# Altium PCB Akustikk_forsterkerkrets.PcbDoc
Units mm, origin at the board's own origin, x right, y up, seen from the top; angles counter-clockwise.
Board outline 133.3 x 70 mm, 3 copper layers (Top Layer, Ground Plane, Bottom Layer), stack 0.488 mm thick; 79 components, 45 nets, 323 pads, 37 vias.
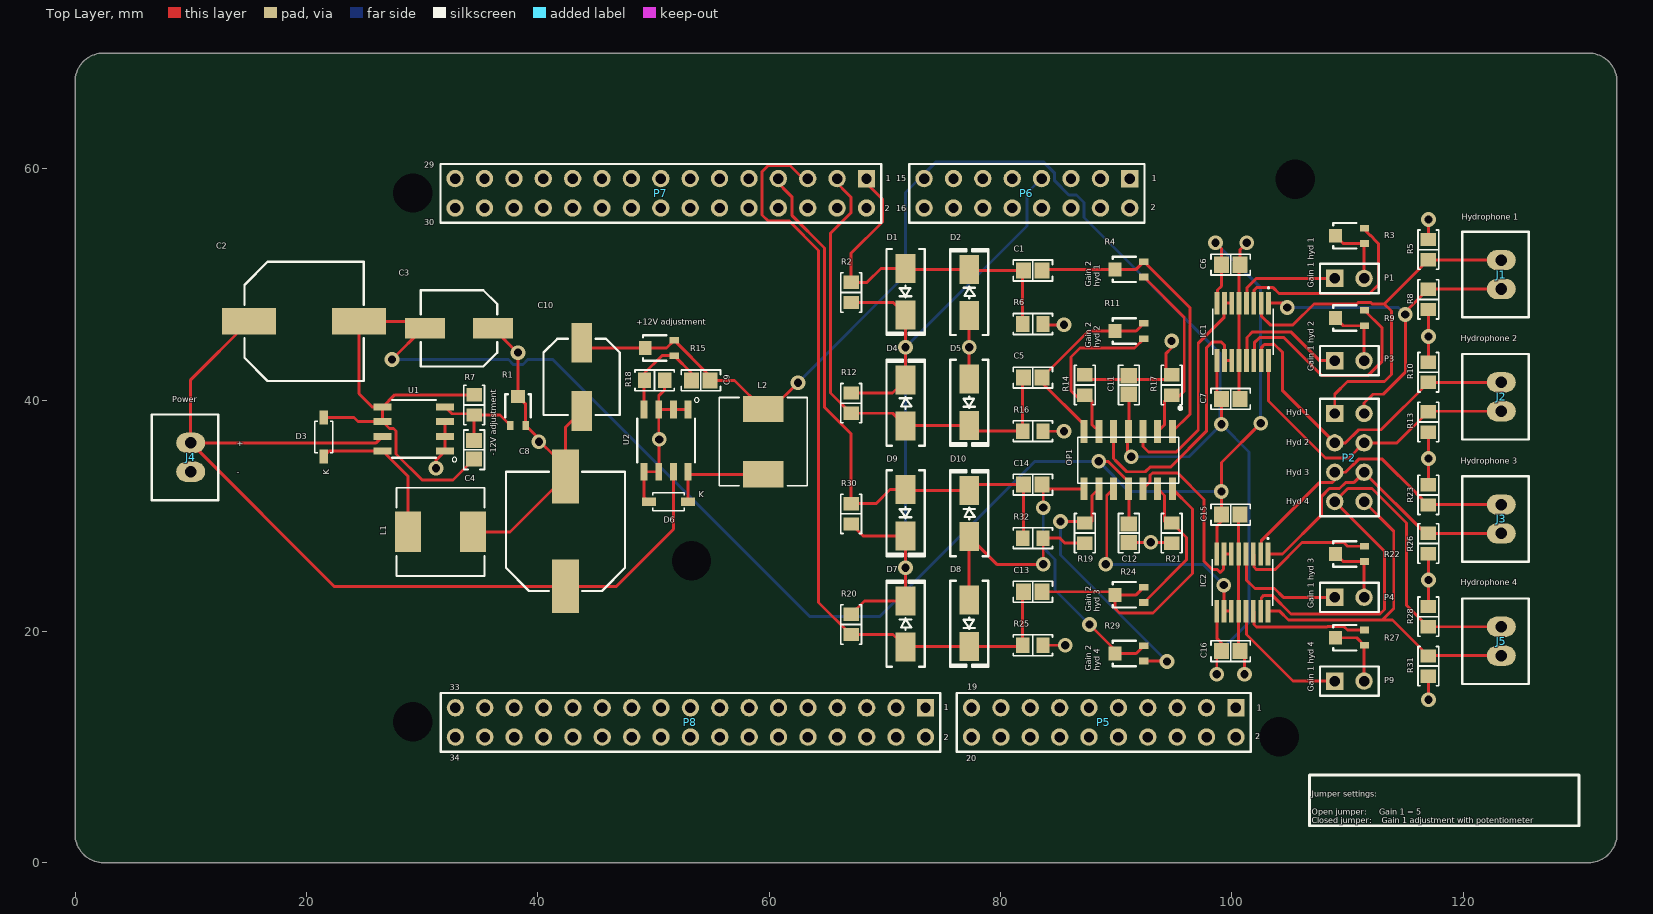
[diagram p0: Top Layer view]
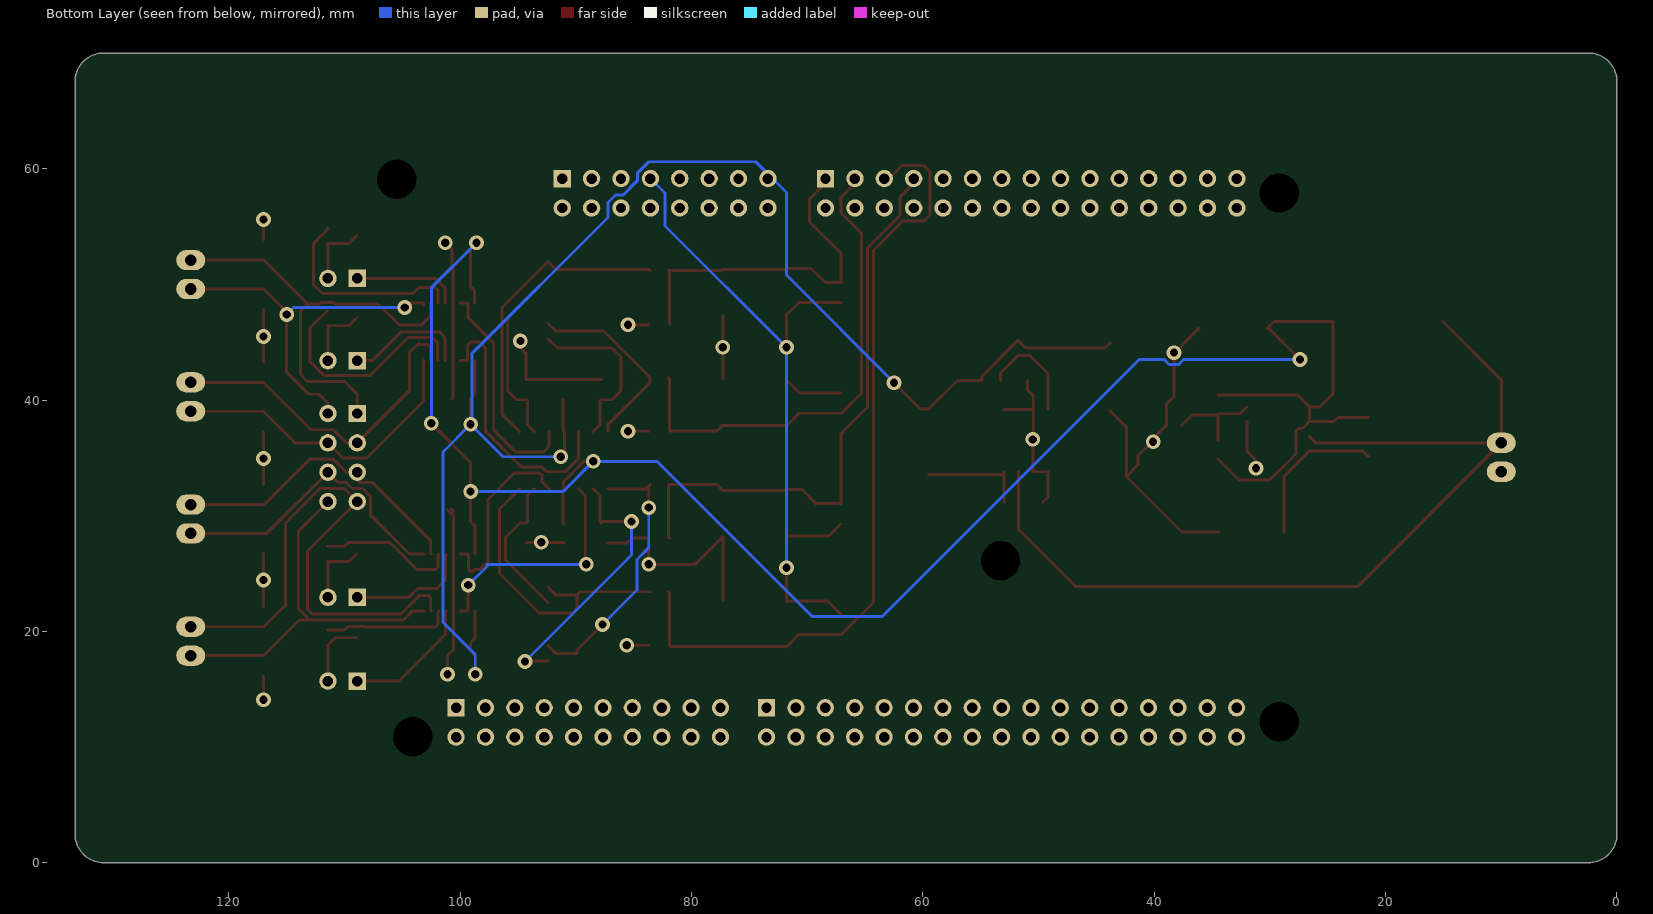
[diagram p1: Bottom Layer view, seen from below]
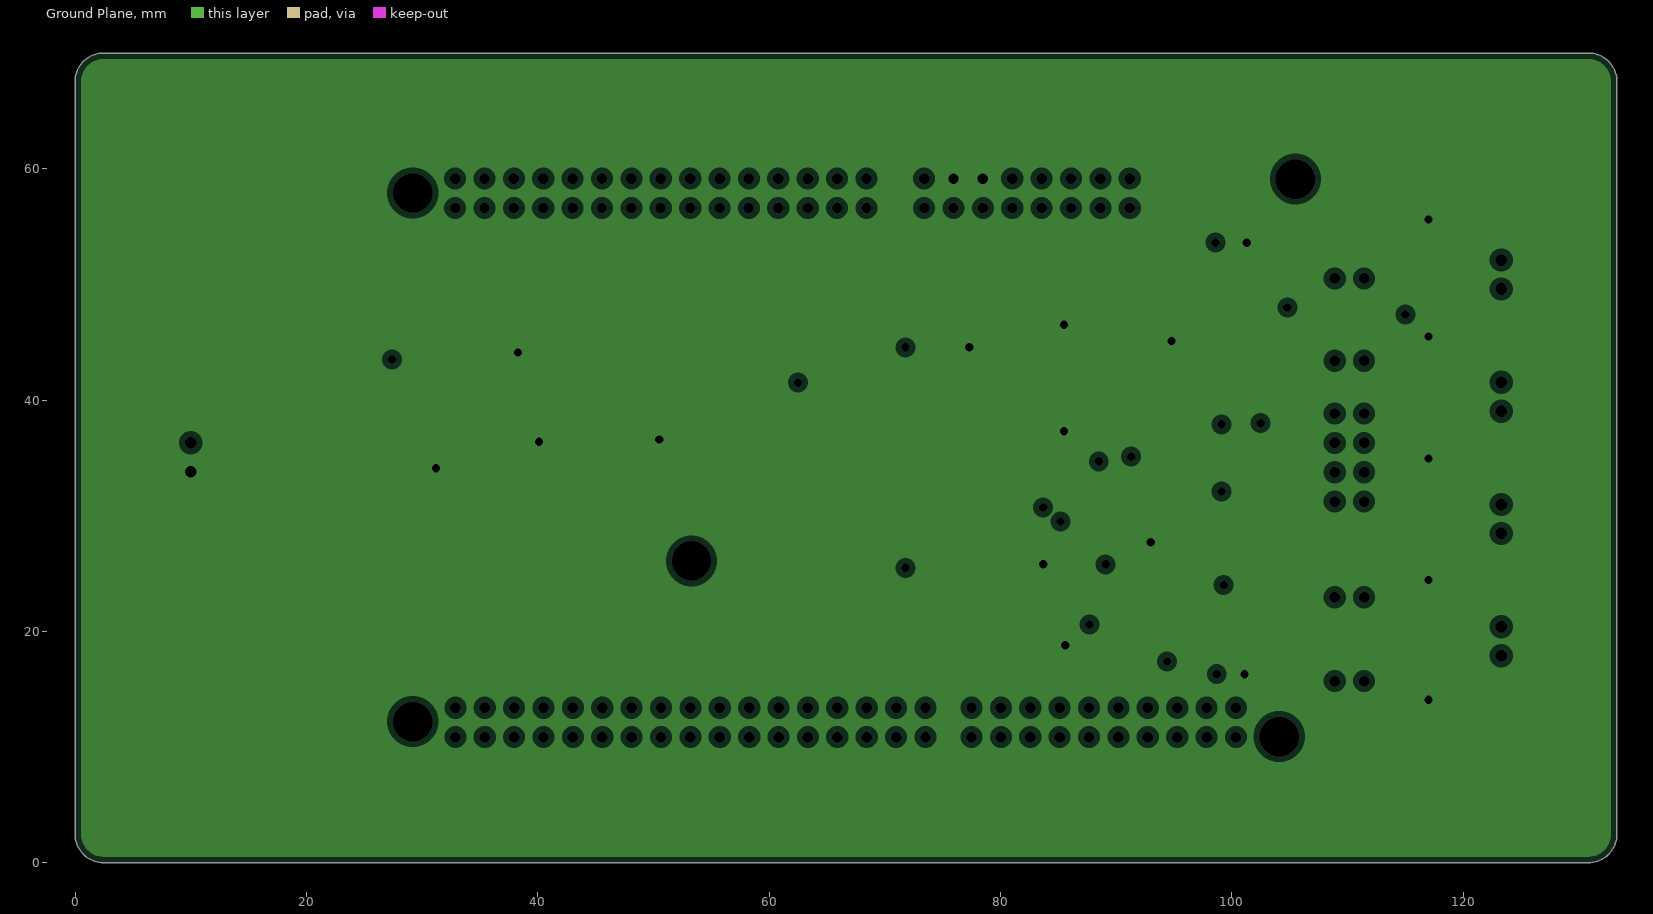
[diagram p2: Ground Plane, clearances drawn from the general rule]
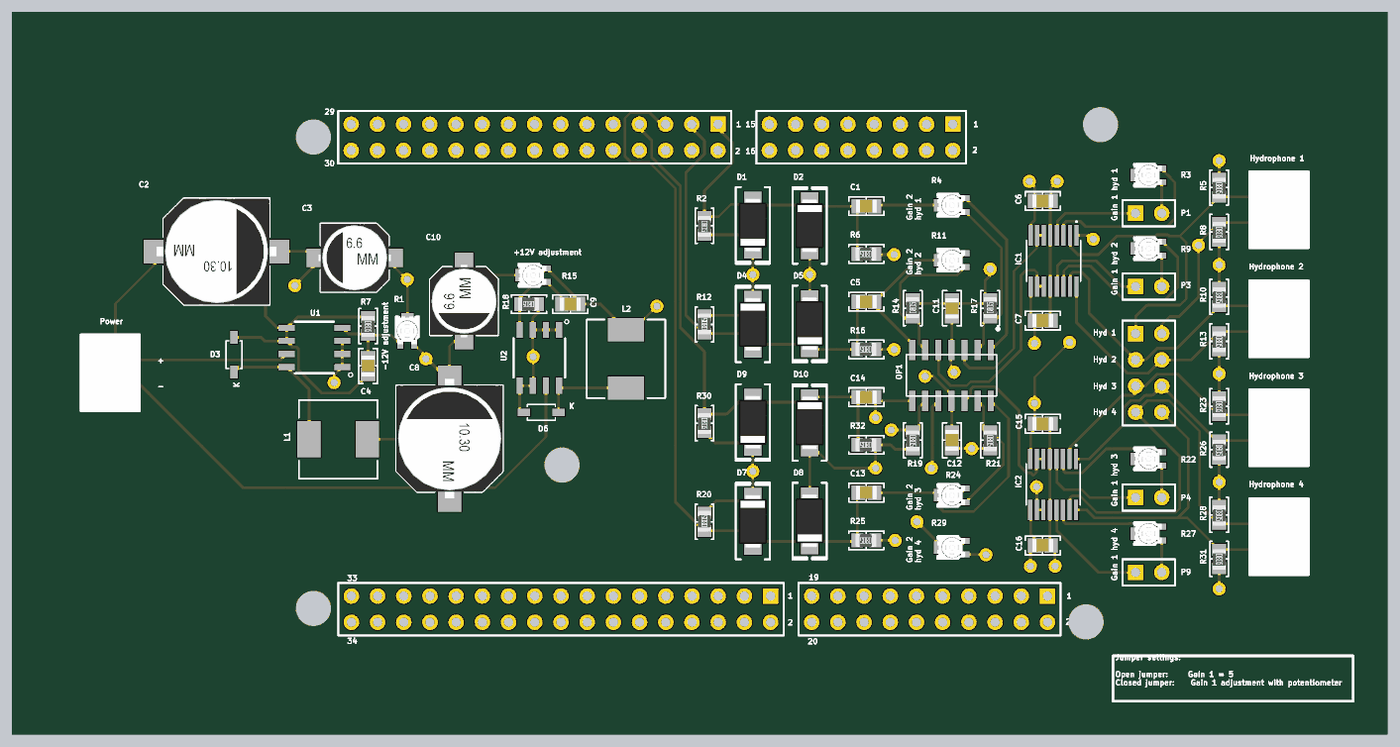
[diagram p3: 3D render of the assembled board from above, using the file's embedded part models]

## Layer stack, top to bottom
Top Solder: solder mask 0.0102, Solder Resist, Dk 3.5
Top Layer: signal copper 0.0356
Dielectric 1: core 0.254, FR-4, Dk 4.2
Ground Plane: plane copper 0.036, net GND
Dielectric 2: prepreg 0.127, Dk 4.2
Bottom Layer: signal copper 0.0356
Bottom Solder: solder mask 0.0102, Solder Resist, Dk 3.5

## Board outline
133.3,2.489 cw(c130.811,2.489) 130.811,0 2.489,0 cw(c2.489,2.489) 0,2.489 0,67.511 cw(c2.489,67.511) 2.489,70 130.811,70 cw(c130.811,67.511) 133.3,67.511

## Design rules (kind name [scope] priority, off if disabled: settings)
Clearance [All] p1: gap=0.254 ignorepadtopadclearanceinfootprint=FALSE except(0: Arc-Hole Track-Hole SMDPad-Hole THPad-Hole Via-Hole Fill-Hole Poly-Hole Region-Hole Text-Hole; 0.1: SMDPad-SMDPad)
PlaneClearance [All] p1: clearance=0.508
PlaneConnect [All] p1: planeconnectstyle=Relief reliefexpansion=0.508 reliefentries=4 reliefconductorwidth=0.254 reliefairgap=0.254
PolygonConnect [All] p1: connectstyle=Relief reliefconductorwidth=0.254 reliefentries=4 polygonreliefangle="90 Angle" airgapwidth=0.254
RoutingVias [All] p1: holewidth=0.711 width=1.27 viastyle="Through Hole" minholewidth=0.711 minwidth=1.27 maxholewidth=0.711 maxwidth=1.27
SolderMaskExpansion [All] p1: expansion=0.102
Width [All] p1: maxlimit=0.254 minlimit=0.254 preferedwidth=0.254
28 further rules are at their usual default settings.

## Components (designator, comment, footprint, x,y, rotation, side; value= is the part's Value field where it differs from the comment)
C1 "1uF" "CAP 0805/2012" 82.8,51.2 r180 top
C2 "100uF" "CAP ALUM 10.3MM" 19.8,46.8 r0 top
C3 "220uF" "CAP ALUM 6.6MM" 33.2,46.2 r180 top
C4 "1500pF" "CAP 0805/2012" 34.5,35.7 r90 top
C5 "1uF" "CAP 0805/2012" 82.8,41.943 r180 top
C6 "0.1uF" "CAP 0805/2012" 99.9,51.7 r0 top
C7 "0.1uF" "CAP 0805/2012" 99.9,40.1 r180 top
C8 "100uF" "CAP ALUM 10.3MM" 42.4,28.65 r90 top
C9 "1500pF" "CAP 0805/2012" 54.1,41.7 r0 top
C10 "220uF" "CAP ALUM 6.6MM" 43.8,42 r270 top
C11 "0.1uF" "CAP 0805/2012" 91.1,41.3 r270 top
C12 "0.1uF" "CAP 0805/2012" 91.1,28.5 r270 top
C13 "1uF" "CAP 0805/2012" 82.8,23.429 r180 top
C14 "1uF" "CAP 0805/2012" 82.8,32.686 r180 top
C15 "0.1uF" "CAP 0805/2012" 99.9,30.1 r0 top
C16 "0.1uF" "CAP 0805/2012" 99.9,18.3 r180 top
D1 "B130-13-F" "DO214AC SMA" 71.8,49.367 r270 top
D2 "B130-13-F" "DO214AC SMA" 77.3,49.3 r90 top
D3 "1N5819HW-7-F" 1N5819HW-7-F 21.5,36.8 r90 top
D4 "B130-13-F" "DO214AC SMA" 71.8,39.744 r90 top
D5 "B130-13-F" "DO214AC SMA" 77.3,39.811 r270 top
D6 "1N5819HW-7-F" 1N5819HW-7-F 51.3,31.2 r180 top
D7 "B130-13-F" "DO214AC SMA" 71.8,20.633 r90 top
D8 "B130-13-F" "DO214AC SMA" 77.3,20.7 r270 top
D9 "B130-13-F" "DO214AC SMA" 71.8,30.256 r270 top
D10 "B130-13-F" "DO214AC SMA" 77.3,30.189 r90 top
IC1 "INA2126" SOP63P600X175-16N 100.95,45.9 r270 top
IC2 "INA2126" SOP63P600X175-16N 100.913,24.225 r270 top
J1 "Hydrophone 1" "JST XH B2B-XH-A" 123.3,50.85 r270 top
J2 "Hydrophone 2" "JST XH B2B-XH-A" 123.3,40.283 r270 top
J3 "Hydrophone 3" "JST XH B2B-XH-A" 123.3,29.717 r270 top
J4 "Power" "JST XH B2B-XH-A" 10,35.05 r270 top
J5 "Hydrophone 4" "JST XH B2B-XH-A" 123.3,19.15 r270 top
L1 "DR74-101-R" DR74-101-R 31.6,28.6 r180 top value="100 µH"
L2 "DR74-101-R" DR74-101-R 59.5,36.4 r270 top value="100 µH"
OP1 "4x Operational Amplifier 25MHz" SOIC127P600X175-14N 91.053,34.8 r270 top
P1 "Valg av forstekning" HDR1X2 108.9,50.513 r0 top
P2 "Testpins" HDR2X4 108.9,38.84 r270 top
P3 "Valg av forstekning" HDR1X2 108.9,43.4 r0 top
P4 "Valg av forstekning" HDR1X2 108.9,22.947 r0 top
P5 "CN7 header 10X2" HDR2X10 100.36,13.4 r180 top
P6 "CN8 header 8X2" HDR2X8 91.18,59.14 r180 top
P7 "CN9 header 15X2" HDR2X15 68.42,59.14 r180 top
P8 "CN10 header 17X2" HDR2X17 73.52,13.4 r180 top
P9 "Valg av forstekning" HDR1X2 108.9,15.7 r0 top
R1 "50k" "POT BOURNS TRIMPOT 3302" 38.3,39.1 r0 top
R2 "100k" "RES 0805/2012" 67.1,49.3 r270 top
R3 "20k" "POT BOURNS TRIMPOT 3302" 110.17,54.2 r90 top
R4 "100k" "POT BOURNS TRIMPOT 3302" 91.1,51.3 r90 top
R5 "47k" "RES 0805/2012" 117,53 r270 top
R6 "100k" "RES 0805/2012" 82.8,46.571 r180 top
R7 "1.21k" "RES 0805/2012" 34.5,39.575 r270 top
R8 "47k" "RES 0805/2012" 117,48.7 r270 top
R9 "20k" "POT BOURNS TRIMPOT 3302" 110.17,47.087 r90 top
R10 "47k" "RES 0805/2012" 117,42.4 r270 top
R11 "100k" "POT BOURNS TRIMPOT 3302" 91.1,45.962 r90 top
R12 "100k" "RES 0805/2012" 67.1,39.733 r90 top
R13 "47k" "RES 0805/2012" 117,38.1 r270 top
R14 "5.1k" "RES 0805/2012" 87.3,41.3 r90 top
R15 "50k" "POT BOURNS TRIMPOT 3302" 50.5,44.5 r90 top
R16 "100k" "RES 0805/2012" 82.8,37.314 r180 top
R17 "5.1k" "RES 0805/2012" 94.8,41.3 r90 top
R18 "1.21k" "RES 0805/2012" 50.1,41.7 r180 top
R19 "5.1k" "RES 0805/2012" 87.3,28.5 r270 top
R20 "100k" "RES 0805/2012" 67.1,20.6 r90 top
R21 "5.1k" "RES 0805/2012" 94.8,28.5 r270 top
R22 "20k" "POT BOURNS TRIMPOT 3302" 110.17,26.7 r90 top
R23 "47k" "RES 0805/2012" 117,31.8 r270 top
R24 "100k" "POT BOURNS TRIMPOT 3302" 91.1,23.162 r90 top
R25 "100k" "RES 0805/2012" 82.8,18.8 r180 top
R26 "47k" "RES 0805/2012" 117,27.6 r270 top
R27 "20k" "POT BOURNS TRIMPOT 3302" 110.17,19.453 r90 top
R28 "47k" "RES 0805/2012" 117,21.275 r270 top
R29 "100k" "POT BOURNS TRIMPOT 3302" 91.1,18.1 r90 top
R30 "100k" "RES 0805/2012" 67.1,30.167 r270 top
R31 "47k" "RES 0805/2012" 117,17 r270 top
R32 "100k" "RES 0805/2012" 82.8,28.057 r180 top
U1 "SOIC127P600X175-8N" SOIC127P600X175-8N 29.3,37.5 r180 top
U2 "SOIC127P600X175-8N" SOIC127P600X175-8N 51.1,36.5 r270 top

## Footprints (in the part's own frame and the unit in brackets; to place one, negate y for a bottom-side part, rotate by r counter-clockwise, add the part's x,y. Pads: shape width x height; smd on the part's side, far side on the other; paste and mask are expansions set on the pad)
1N5819HW-7-F [mm]
  rect 1.21x0.73 smd: 1(-1.68,0) 2(1.68,0)
  silkscreen extent -1.35,-0.77 1.35,0.78
"CAP 0805/2012" [mm] "Chip Capacitor, 2-Leads, Body 2.00x1.20mm, IPC Medium Density"
  rect 1.3x1.4 smd: 1(-0.8,0) 2(0.8,0)
  silkscreen extent -1.7,-0.9 1.7,0.9, body extent -1,-0.64 1,0.64, height 1.26
"CAP ALUM 6.6MM" [mm] "Aluminum Electrolytic Capacitor, Body 6.60x6.60x7.70mm, IPC Low Density"
  rect 3.45x1.8 smd: 1(-2.95,0) 2(2.95,0)
  silkscreen extent -3.3,-3.3 3.3,3.3, body extent -3.5,-3.3 3.5,3.3, height 7.7
"CAP ALUM 10.3MM" [mm] "Aluminum Electrolytic Capacitor, Body 10.30x10.30x10.50mm, IPC Low Density"
  rect 4.65x2.3 smd: 1(-4.75,0) 2(4.75,0)
  silkscreen extent -5.15,-5.15 5.15,5.15, body extent -5.8,-5.15 5.8,5.15, height 10.5
"DO214AC SMA" [mm] "Molded Diode, 2-Leads, Body 4.30x2.60mm, IPC Medium Density"
  rect 2.5x1.7 smd: 1(-2,0) 2(2,0)
  silkscreen extent -3.68,-1.65 3.75,1.65, body extent -2.6,-1.37 2.6,1.37, height 2.4
DR74-101-R [mil]
  rect 89x138 smd: 1(-111,0) 2(111,0)
  silkscreen extent -150,-150 150,150
HDR1X2 [mm] "Connector; Header; 2 Position"
  rect 1.5x1.5 hole 0.9: 1(0,0)
  round 1.5 hole 0.9: 2(2.54,0)
  silkscreen extent -1.27,-1.27 3.81,1.27
HDR2X4 [mm] "Connector; Header; 4x2 Position"
  rect 1.5x1.5 hole 0.9: 1(0,0)
  round 1.5 hole 0.9: 2(0,2.54) 3(2.54,0) 4(2.54,2.54) 5(5.08,0) 6(5.08,2.54) 7(7.62,0) 8(7.62,2.54)
  silkscreen extent -1.27,-1.27 8.89,3.81
HDR2X8 [mm] "Connector; Header; 8x2 Position"
  rect 1.5x1.5 hole 0.9: 1(0,0)
  round 1.5 hole 0.9: 2(0,2.54) 3(2.54,0) 4(2.54,2.54) 5(5.08,0) 6(5.08,2.54) 7(7.62,0) 8(7.62,2.54) 9(10.16,0) 10(10.16,2.54) 11(12.7,0) 12(12.7,2.54) 13(15.24,0) 14(15.24,2.54) 15(17.78,0) 16(17.78,2.54)
  silkscreen extent -1.27,-1.27 19.05,3.81
HDR2X10 [mm] "Connector; Header; 10x2 Position"
  rect 1.5x1.5 hole 0.9: 1(0,0)
  round 1.5 hole 0.9: 2(0,2.54) 3(2.54,0) 4(2.54,2.54) 5(5.08,0) 6(5.08,2.54) 7(7.62,0) 8(7.62,2.54) 9(10.16,0) 10(10.16,2.54) 11(12.7,0) 12(12.7,2.54) 13(15.24,0) 14(15.24,2.54) 15(17.78,0) 16(17.78,2.54) 17(20.32,0) 18(20.32,2.54) 19(22.86,0) 20(22.86,2.54)
  silkscreen extent -1.27,-1.27 24.13,3.81
HDR2X15 [mm] "Connector; Header; 15x2 Position"
  rect 1.5x1.5 hole 0.9: 1(0,0)
  round 1.5 hole 0.9: 2(0,2.54) 3(2.54,0) 4(2.54,2.54) 5(5.08,0) 6(5.08,2.54) 7(7.62,0) 8(7.62,2.54) 9(10.16,0) 10(10.16,2.54) 11(12.7,0) 12(12.7,2.54) 13(15.24,0) 14(15.24,2.54) 15(17.78,0) 16(17.78,2.54) 17(20.32,0) 18(20.32,2.54) 19(22.86,0) 20(22.86,2.54) 21(25.4,0) 22(25.4,2.54) 23(27.94,0) 24(27.94,2.54) 25(30.48,0) 26(30.48,2.54) 27(33.02,0) 28(33.02,2.54) 29(35.56,0) 30(35.56,2.54)
  silkscreen extent -1.27,-1.27 36.83,3.81
HDR2X17 [mm] "Connector; Header; 17x2 Position"
  rect 1.5x1.5 hole 0.9: 1(0,0)
  round 1.5 hole 0.9: 2(0,2.54) 3(2.54,0) 4(2.54,2.54) 5(5.08,0) 6(5.08,2.54) 7(7.62,0) 8(7.62,2.54) 9(10.16,0) 10(10.16,2.54) 11(12.7,0) 12(12.7,2.54) 13(15.24,0) 14(15.24,2.54) 15(17.78,0) 16(17.78,2.54) 17(20.32,0) 18(20.32,2.54) 19(22.86,0) 20(22.86,2.54) 21(25.4,0) 22(25.4,2.54) 23(27.94,0) 24(27.94,2.54) 25(30.48,0) 26(30.48,2.54) 27(33.02,0) 28(33.02,2.54) 29(35.56,0) 30(35.56,2.54) 31(38.1,0) 32(38.1,2.54) 33(40.64,0) 34(40.64,2.54)
  silkscreen extent -1.27,-1.27 41.91,3.81
"JST XH B2B-XH-A" [mm]
  oval 1.75x2.5 hole 1: 1(-1.25,0) 2(1.25,0)
  silkscreen extent -3.7,-3.38 3.7,2.38, body extent -3.7,-3.38 3.7,2.38, height 7
"POT BOURNS TRIMPOT 3302" [mm] "Bourns Trimpot 3302 - Open Frame 2.75mm x 2.20mm x 1.05mm"
  rect 0.575x0.8 smd: 1(-0.662,-1.3) 3(0.662,-1.3)
  rect 1.2x1.1 smd: 2(0,1.2)
  silkscreen extent -1.1,-0.6 1.1,1.4, body extent -1.1,-1.3 1.1,1.45, height 0.81
"RES 0805/2012" [mm] "Chip Resistor, 2-Leads, Body 2.00x1.25mm, IPC Medium Density"
  rect 1.15x1.35 smd: 1(-0.875,0) 2(0.875,0)
  silkscreen extent -1.7,-0.9 1.7,0.9, body extent -0.95,-0.62 1.05,0.63, height 0.6
SOIC127P600X175-8N [mm]
  rect 1.55x0.6 smd: 1(-2.7,1.905) 2(-2.7,0.635) 3(-2.7,-0.635) 4(-2.7,-1.905) 5(2.7,-1.905) 6(2.7,-0.635) 7(2.7,0.635) 8(2.7,1.905)
  silkscreen extent -3.7,-2.5 1.9,2.85
SOIC127P600X175-14N [mm]
  rect 1.97x0.6 smd: 1(-2.475,3.81) 2(-2.475,2.54) 3(-2.475,1.27) 4(-2.475,0) 5(-2.475,-1.27) 6(-2.475,-2.54) 7(-2.475,-3.81) 8(2.475,-3.81) 9(2.475,-2.54) 10(2.475,-1.27) 11(2.475,0) 12(2.475,1.27) 13(2.475,2.54) 14(2.475,3.81)
  silkscreen extent -4.6,-4.38 2,4.6
SOP63P600X175-16N [mm]
  rect 1.97x0.41 smd: 1(-2.475,2.223) 2(-2.475,1.588) 3(-2.475,0.953) 4(-2.475,0.318) 5(-2.475,-0.317) 6(-2.475,-0.952) 7(-2.475,-1.587) 8(-2.475,-2.222) 9(2.475,-2.222) 10(2.475,-1.587) 11(2.475,-0.952) 12(2.475,-0.317) 13(2.475,0.318) 14(2.475,0.953) 15(2.475,1.588) 16(2.475,2.223)
  silkscreen extent -3.87,-2.62 1.99,2.62

## Part data
C1 C5 C13 C14: library part C0805C105J3RACTU, "CAP CER 1UF 25V X7R 0805", Device Package="0805 (2012 Metric)", Manufacturer=Kemet, Supplier Part Number 1=399-10060-2-ND, TemperatureCoefficient=X7R, TemperatureRange="-55C ~ 125C", Tolerance=5%, Voltage=25V, ComponentLink1Description=Datasheet, ComponentLink1URL=http://www.kemet.com/docfinder?Partnumber=C0805C105J3RACTU, ComponentLink2Description="Digi-Key listing", ComponentLink2URL=http://digikey.com/product-detail/en/C0805C105J3RACTU/399-10060-2-ND/2211758, PartId=6145, Part Number=C0805C105J3RACTU, Price=0,355, Supplier 1=Digi-Key, Type=-
C2 C8: library part EEE-FC1H101P, "CAP ALUM 100UF 20% 50V SMD", Device Package="Radial, Can - SMD", Lifetime @ Temp="1000 Hrs @ 105C", Manufacturer="Panasonic Electronic Components", Ripple Current=375mA, Supplier Part Number 1=PCE4013TR-ND, TemperatureRange="-40C ~ 105C", Tolerance=20%, Voltage=50V, ComponentLink1Description=Datasheet, ComponentLink1URL=http://industrial.panasonic.com/www-cgi/jvcr13pz.cgi?E+PZ+3+ABA0005+EEEFC1H101P+7+WW, ComponentLink2Description="Digi-Key listing", ComponentLink2URL=http://digikey.com/product-detail/en/EEE-FC1H101P/PCE4013TR-ND/817422, Impedance="300 mOhm", PartId=7438, Part Number=EEE-FC1H101P, Price=0,4156, Supplier 1=Digi-Key, Type=AEC-Q200
C3 C10: library part EEE-FTE221XAP, "CAP ALUM 220UF 20% 25V SMD", Device Package="Radial, Can - SMD", Lifetime @ Temp="2000 Hrs @ 105C", Manufacturer="Panasonic Electronic Components", Ripple Current=390mA, Supplier Part Number 1=PCE5009TR-ND, TemperatureRange="-55C ~ 105C", Tolerance=20%, Voltage=25V, ComponentLink1Description=Datasheet, ComponentLink1URL=http://industrial.panasonic.com/lecs/www-data/pdf/ABA0000/ABA0000CE135.pdf, ComponentLink2Description="Digi-Key listing", ComponentLink2URL=http://digikey.com/product-detail/en/EEE-FTE221XAP/PCE5009TR-ND/2652040, Impedance=-, PartId=7275, Part Number=EEE-FTE221XAP, Price=0,3668, Supplier 1=Digi-Key, Type=Automotive
C4 C9: library part C2012C0G1H152J060AA, "CAP CER 1500PF 50V C0G 0805", Device Package="0805 (2012 Metric)", Manufacturer="TDK Corporation", Supplier Part Number 1=445-1331-2-ND, TemperatureCoefficient="C0G, NP0", TemperatureRange="-55C ~ 125C", Tolerance=5%, Voltage=50V, ComponentLink1Description=Datasheet, ComponentLink1URL=https://product.tdk.com/info/en/catalog/datasheets/mlcc_commercial_general_en.pdf, ComponentLink2Description="Digi-Key listing", ComponentLink2URL=http://digikey.com/product-detail/en/C2012C0G1H152J060AA/445-1331-2-ND/513857, PartId=4413, Part Number=C2012C0G1H152J060AA, Price=0,0308, Supplier 1=Digi-Key, Type=-
C6 C7 C11 C12 C15 C16: library part CL21B104KACNNNC, "CAP CER 0.1UF 25V X7R 0805", Device Package="0805 (2012 Metric)", Manufacturer="Samsung Electro-Mechanics America, Inc.", Supplier Part Number 1=1276-1099-2-ND, TemperatureCoefficient=X7R, TemperatureRange="-55C ~ 125C", Tolerance=10%, Voltage=25V, ComponentLink1Description=Datasheet, ComponentLink1URL=http://www.samsungsem.com/kr/support/product-search/mlcc/CL21B104KACNNNC.jsp, ComponentLink2Description="Digi-Key listing", ComponentLink2URL=http://digikey.com/product-detail/en/CL21B104KACNNNC/1276-1099-2-ND/3886757, PartId=5699, Part Number=CL21B104KACNNNC, Price=0,0099, Supplier 1=Digi-Key, Type=-
D1 D2 D4 D5 D7 D8 D9 D10: "DIODE SCHOTTKY 30V 1A SMA", Current Rectified=1A, Current Reverse Leakage @ Vr="500uA @ 30V", Device Package="DO-214AC, SMA", Junction Operating Temperature="-65C ~ 150C", Manufacturer="Diodes Incorporated", Supplier Part Number 1=B130-FDITR-ND, Voltage DC Reverse (Vr)=30V, Voltage Forward (Vf)="500mV @ 1A", ComponentLink1Description=Datasheet, ComponentLink1URL=http://www.diodes.com/_files/datasheets/ds13002.pdf, ComponentLink2Description="Digi-Key Listing", ComponentLink2URL=http://www.digikey.ca/product-detail/en/B130-13-F/B130-FDITR-ND/814935, PartId=7122, Part Number=B130-13-F, Price=0,0852, Reverse Recovery Time (trr)=-, Supplier 1=Digi-Key, Type="Surface Mount"
D3 D6: "1N5819HW Series 40 V 1 A Surface Mount Schottky Barrier Rectifier - SOD-123", Package="SOD-123 Diodes Inc.", Supplier Part Number 1=1N5819HW-FDICT-ND, ComponentLink1Description="Manufacturer Link", ComponentLink1URL=https://www.digikey.no/en/supplier-centers/d/diodes, ComponentLink2Description=Datasheet, ComponentLink2URL=https://www.diodes.com/assets/Datasheets/ds30217.pdf, Digi-Key_Part_Number=1N5819HW-FDICT-ND, Digi-Key_Purchase_URL=https://www.digikey.no/product-detail/en/diodes-incorporated/1N5819HW-7-F/1N5819HW-FDICT-ND/815283?utm_source=snapeda&utm_medium=aggregator&utm_campaign=symbol, MF="Diodes Inc.", MP=1N5819HW-7-F, Part Number=1N5819HW-7-F, SnapEDA_Link=https://www.snapeda.com/parts/1N5819HW-7-F/Diodes%20Inc./view-part/?ref=snap, Supplier 1=Digi-Key
IC1 IC2: library part INA2126EA/250, "the ina126 and ina2126 are precision instrumentation amplifiers for accurate low noise differential signal acquisitio...", Package=None, Supplier Part Number 1=INA2126EACT-ND, Availability=Unavailable, ComponentLink1Description="Manufacturer Link", ComponentLink1URL=http://www.ti.com/, ComponentLink2Description=Datasheet, ComponentLink2URL=http://www.ti.com/lit/ds/symlink/ina126.pdf, MF="Texas Instruments", MP=INA2126, Part Number=INA2126EA/250, Price=None, SnapEDA_Link=https://www.snapeda.com/parts/INA2126/Texas%20Instruments/view-part/?ref=snap, Supplier 1=Digi-Key
J1 J2 J3 J4 J5: library part B2B-XH-A(LF)(SN), "CONN HEADER XH TOP 2POS 2.5MM", Colour=Natural, Manufacturer="JST Sales America Inc.", Supplier Part Number 1=455-2247-ND, ComponentLink1Description=Datasheet, ComponentLink1URL=http://www.jst-mfg.com/product/pdf/eng/eXH.pdf, ComponentLink2Description="Digi-Key Listing", ComponentLink2URL=http://www.digikey.com/product-detail/en/jst-sales-america-inc/B2B-XH-A(LF)(SN)/455-2247-ND/1651045, Contact Finish=Tin, Fastening Type="Detent Lock", Number Of Positions=2, Number Of Rows=1, PartId=16449, Part Number=B2B-XH-A(LF)(SN), Pitch="0.098\" (2.50mm)", Price=0,15, Series=XH, Supplier 1=Digi-Key, Type="Header, Shrouded"
L1 L2: "Inductor Power Shielded Drum Core 101.6uH/100uH 20% 100KHz Ferrite 860mA 383mOhm DCR T/R", Package="Nonstandard Eaton", Supplier Part Number 1=513-1225-1-ND, Availability=Unavailable, ComponentLink1Description="Manufacturer Link", ComponentLink1URL=https://www.digikey.no/en/supplier-centers/e/eaton, ComponentLink2Description=Datasheet, ComponentLink2URL=https://www.eaton.com/content/dam/eaton/products/electronic-components/resources/data-sheet/eaton-dr-high-power-density-high-efficiency-shielded-drum-core-power-inductors-data-sheet.pdf, Irms=860mA, MF=Eaton, MP=DR74-101-R, Part Number=DR74-101-R, Price=None, SnapEDA_Link=https://www.snapeda.com/parts/DR74-101-R/Eaton/view-part/?ref=snap, Supplier 1=Digi-Key
OP1: library part LM837MX/NOPB, Supplier Part Number 1=296-43966-1-ND, ComponentLink1Description="Manufacturer Link", ComponentLink1URL=http://www.ti.com/, ComponentLink2Description=Datasheet, ComponentLink2URL=http://www.ti.com/lit/ds/symlink/lm837.pdf, Part Number=LM837MX/NOPB, Supplier 1=Digi-Key
P1 P3 P4 P9: library part "Header 2", "Header, 2-Pin", LatestRevisionDate=17-Jul-2002, LatestRevisionNote="Re-released for DXP Platform.", Publisher="Altium Limited"
P2: library part "Header 4X2", "Header, 4-Pin, Dual row", LatestRevisionDate=17-Jul-2002, LatestRevisionNote="Re-released for DXP Platform.", Publisher="Altium Limited"
P5: library part "Header 10X2", "Header, 10-Pin, Dual row", LatestRevisionDate=17-Jul-2002, LatestRevisionNote="Re-released for DXP Platform.", Publisher="Altium Limited"
P6: library part "Header 8X2", "Header, 8-Pin, Dual row", LatestRevisionDate=17-Jul-2002, LatestRevisionNote="Re-released for DXP Platform.", Publisher="Altium Limited"
P7: library part "Header 15X2", "Header, 15-Pin, Dual row", LatestRevisionDate=17-Jul-2002, LatestRevisionNote="Re-released for DXP Platform.", Publisher="Altium Limited"
P8: library part "Header 17X2", "Header, 17-Pin, Dual row", LatestRevisionDate=17-Jul-2002, LatestRevisionNote="Re-released for DXP Platform.", Publisher="Altium Limited"
R1 R3 R4 R9 R11 R15 R22 R24 R27 R29: library part 3302W-3-203E, "TRIMMER 20K OHM 0.15W SMD", Manufacturer="Bourns Inc.", PowerRating=0.15W, Supplier Part Number 1=3302W-203ECT-ND, TemperatureCoefficient=250ppm/C, Tolerance=25%, Adjustment Type="Top Adjustment", ComponentLink1Description=Datasheet, ComponentLink1URL=http://www.bourns.com/docs/Product-Datasheets/3302.pdf, ComponentLink2Description="Digi-Key Listing", ComponentLink2URL=https://www.digikey.com/product-detail/en/bourns-inc/3302W-3-203E/3302W-203ECT-ND/612878, Number Of Turns=1, PartId=29442, Part Number=3302W-3-203E, Price=0,97, Supplier 1=Digi-Key
R2 R6 R12 R16 R20 R25 R30 R32: library part ERJ-6GEYJ104V, "RES SMD 100K OHM 5% 1/8W 0805", Device Package="0805 (2012 Metric)", Manufacturer="Panasonic Electronic Components", PowerRating="0.125W, 1/8W", Supplier Part Number 1=P100KATR-ND, TemperatureCoefficient=200ppm/C, TemperatureRange="-55C ~ 155C", Tolerance=5%, ComponentLink1Description=Datasheet, ComponentLink1URL=http://industrial.panasonic.com/www-cgi/jvcr13pz.cgi?E+PZ+3+AOA0001+ERJ6GEYJ104V+7+WW, ComponentLink2Description="Digi-Key Listing", ComponentLink2URL=https://www.digikey.com/product-detail/en/panasonic-electronic-components/ERJ-6GEYJ104V/P100KATR-ND/83110, PartId=11445, Part Number=ERJ-6GEYJ104V, Price=0,0032, Supplier 1=Digi-Key
R5 R8 R10 R13 R23 R26 R28 R31: library part ERJ-6ENF4702V, "RES SMD 47K OHM 1% 1/8W 0805", Device Package="0805 (2012 Metric)", Manufacturer="Panasonic Electronic Components", PowerRating="0.125W, 1/8W", Supplier Part Number 1=P47.0KCTR-ND, TemperatureCoefficient=100ppm/C, TemperatureRange="-55C ~ 155C", Tolerance=1%, ComponentLink1Description=Datasheet, ComponentLink1URL=http://industrial.panasonic.com/www-cgi/jvcr13pz.cgi?E+PZ+3+AOA0002+ERJ6ENF4702V+7+WW, ComponentLink2Description="Digi-Key listing", ComponentLink2URL=http://digikey.com/product-detail/en/ERJ-6ENF4702V/P47.0KCTR-ND/1746509, PartId=1984, Part Number=ERJ-6ENF4702V, Price=0,0073, Supplier 1=Digi-Key, Type="Thick Film"
R7 R18: library part ERA-6AEB1211V, "RES SMD 1.21K OHM 0.1% 1/8W 0805", Device Package="0805 (2012 Metric)", Manufacturer="Panasonic Electronic Components", PowerRating="0.125W, 1/8W", Supplier Part Number 1=P1.21KDATR-ND, TemperatureCoefficient=25ppm/C, TemperatureRange="-55C ~ 155C", Tolerance=0.1%, ComponentLink1Description=Datasheet, ComponentLink1URL=http://industrial.panasonic.com/lecs/www-data/pdf/AOA0000/AOA0000CE26.pdf, ComponentLink2Description="Digi-Key listing", ComponentLink2URL=http://digikey.com/product-detail/en/ERA-6AEB1211V/P1.21KDATR-ND/2025670, PartId=2672, Part Number=ERA-6AEB1211V, Price=0,0653, Supplier 1=Digi-Key, Type="Thin Film"
R14 R17 R19 R21: library part ERJ-6ENF5101V, "RES SMD 5.1K OHM 1% 1/8W 0805", Device Package="0805 (2012 Metric)", Manufacturer="Panasonic Electronic Components", PowerRating="0.125W, 1/8W", Supplier Part Number 1=P5.10KCTR-ND, TemperatureCoefficient=100ppm/C, TemperatureRange="-55C ~ 155C", Tolerance=1%, ComponentLink1Description=Datasheet, ComponentLink1URL=http://industrial.panasonic.com/www-cgi/jvcr13pz.cgi?E+PZ+3+AOA0002+ERJ6ENF5101V+7+WW, ComponentLink2Description="Digi-Key listing", ComponentLink2URL=http://digikey.com/product-detail/en/ERJ-6ENF5101V/P5.10KCTR-ND/1746513, PartId=2010, Part Number=ERJ-6ENF5101V, Price=0,0073, Supplier 1=Digi-Key, Type="Thick Film"
U1 U2: "SIMPLE SWITCHER® 40V, 500mA Low Component Count Step-Down Regulator 8-SOIC -40 to 125", Package="SOIC-8 Texas Instruments", Supplier Part Number 1=LM2594DADJR2GOSCT-ND, Availability=Unavailable, ComponentLink1Description="Manufacturer Link", ComponentLink1URL=https://www.digikey.com/en/supplier-centers/o/on-semiconductor, ComponentLink2Description=Datasheet, ComponentLink2URL=ww.onsemi.com/pub/Collateral/LM2594-D.PDF, Iout,max=500mA, MF="Texas Instruments", MP=LM2674MX-12/NOPB, Part Number=SOIC127P600X175-8N, Price=None, SnapEDA_Link=https://www.snapeda.com/parts/LM2674MX-12/NOPB/Texas%20Instruments/view-part/?ref=snap, Supplier 1=Digi-Key, Vin,max=40V, Vin,min=4.5V, Vout,max=37V, Vout,min=1.23V

## Free pads (board coordinates)
  round 1.524 hole 3.4: 4(29.2,57.9) 5(29.2,12.2) 6(104.1,10.9) 7(105.5,59.1) 8(53.3,26.1)

## Via types
v1: diameter 1.27, hole 0.711, Top Layer to Bottom Layer, 37 vias

## Nets (pads, with @x,y where several pads share a name; then routed paths per layer and width w, separated by ;. In a path a pad name is that pad's centre, name@x,y a point inside that pad or via, vN(x,y) a via of type N, cw(c..) or ccw(c..) an arc to the next point about the centre after c; other vN are vias at no path point)
+3,3VDC: D1.2 D4.2 D7.2 D9.2 P6.7 R2.2 R12.2 R20.2 R30.2 | length 70.2
  Top Layer w0.254: R20.2 68.258,22.633 D7.2 D9.2 68.136,28.256 R30.2 ; R12.2 70.664,40.608 D4.2 v1(71.8,44.556) D1.2 70.742,48.425 R2.2
  Bottom Layer w0.254: v1(71.8,25.5) v1(71.8,44.556) 82.3,55.056 82.3,57.9 83.16,58.76 P6.7@83.16,59.14
+12VDC: C7.2 C9.2 C10.1 C11.2 C16.2 IC1.9 IC2.9 L2.1 OP1.4 P6.15 R15.2 R15.3 | length 134.9
  Top Layer w0.254: C10.1 44.25,44.5 R15.2 51.137,44.5 R15.3 54.9,42.063 C9.2 57.019,41.7 L2.1 60.219,39.219 v1(62.5,41.5) ; C11.2@91.1,40.1 91.1,37.323 OP1.4 91,37.223 91,35.4 v1(91.3,35.1) ; IC2.9 98.739,21.701 98.739,19.361 99.1,19 C16.2 98.7,17.9 v1(98.7,16.3) ; IC1.9 98.728,40.472 C7.2 v1(99.1,37.9)
  Bottom Layer w0.254: v1(62.5,41.5) 71.8,50.8 71.8,57.94 74.46,60.6 83.699,60.6 84.691,59.608 84.691,58.95 85.91,57.731 86.568,57.731 87.231,57.068 87.231,55.769 99,44 99,38 v1(99.1,37.9) ; v1(91.3,35.1) 96.3,35.1 v1(99.1,37.9) ; v1(98.7,16.3) 98.7,18 101.5,20.8 101.5,35.5 v1(99.1,37.9)
-12VDC: C2.2 C3.2 C4.1 C6.1 C12.1 C15.1 D3.2 IC1.8 IC2.8 OP1.11 R7.1 U1.5 U1.6 | length 175.9
  Top Layer w0.254: D3.2 24.12,38.48 24.465,38.135 U1.6 ; v1(27.4,43.5) 30.1,46.2 C3.2 29.65,46.8 C2.2 24.55,40.55 25.695,39.405 U1.5 ; C4.1 32.684,33.084 30.016,33.084 27.756,35.344 27.756,37.323 27.533,37.546 27.189,37.546 U1.6 ; R7.1 27.645,40.45 U1.5 ; v1(88.5,34.7) 89.3,34.7 91.052,32.948 OP1.11 91.1,32.278 C12.1 ; v1(98.6,53.6) 99.1,53.1 C6.1 99.1,49.841 98.777,49.518 98.777,48.424 IC1.8 ; IC2.8 98.739,26.749 98.739,29.139 99.1,29.5 C15.1 v1(99.1,32.1) 99.1,34.6 v1(102.5,38) ; U1.6 U1.5
  Bottom Layer w0.254: v1(27.4,43.5) 37.463,43.5 37.879,43.084 38.721,43.084 39.137,43.5 41.3,43.5 63.5,21.3 69.6,21.3 83,34.7 v1(88.5,34.7) 91.1,32.1 v1(99.1,32.1) ; v1(98.6,53.6) 102.5,49.7 v1(102.5,38)
GND: C3.1 C6.2 C7.1 C8.2 C10.2 C11.1 C12.2 C15.2 C16.1 D2.1 D5.1 D6.2 D8.1 D10.1 IC1.5 IC1.12 IC2.5 IC2.12 J4.2 L1.1 P6.11 P6.13 R1.2 R1.3 R5.1 R6.1 R8.2 R10.1 R13.2 R14.2 R16.1 R17.2 R18.1 R19.2 R21.2 R23.1 R25.1 R26.2 R28.1 R31.2 R32.1 U1.1 U1.2 U1.3 U2.1 U2.2 U2.3 U2.5 U2.6 | length 140.8
  Top Layer w0.254: v1(31.2,34.1) 31.2,34.795 U1.1 U1.2 U1.3 ; L1.1 37.6,28.6 C8.2 ; C3.1 v1@38.3,44.05 ; v1(38.3,44.1) v1@38.3,44.05 ; v1(40.1,36.4) v1@40.2,36.4 ; C10.2 42.4,37.65 C8.2 ; D6.2 49.195,31.625 U2.5 U2.6 50.5,33.835 v1(50.5,36.6) 50.465,36.635 U2.3 ; R18.1 50.975,40.875 50.465,40.365 U2.3 ; U2.1 U2.2 U2.3 ; D8.1 D10.1 79.689,25.8 v1(83.7,25.8) 83.7,28.032 R32.1 85.143,28.057 85.575,27.625 R19.2 ; D5.1 v1(77.3,44.556) D2.1 ; R25.1 v1(85.6,18.8) ; R16.1 83.689,37.3 v1(85.5,37.3) ; R6.1 83.746,46.5 v1(85.5,46.5) ; R14.2@87.8,41.775 94.3,41.775 94.3,44 94.8,44.5 v1(94.8,45.1) ; C12.2@91.025,27.625 C12.2 94.225,27.7 R21.2@94.3,27.625 ; C7.1 100.633,40.168 IC1.12 IC1.5 100.633,51.633 C6.2 100.7,53 v1(101.3,53.6) ; C15.2@100.8,30.6 100.6,30.4 C15.2@100.8,30.2 ; v1(101.1,16.3) 101.1,17.9 C16.1 100.595,18.405 IC2.12 IC2.5 100.595,29.995 C15.2 C15.2@100.8,30.2 ; C15.2@101.1,30.5 C15.2@100.8,30.2 ; v1(117,14.1) R31.2 ; R28.1 v1(117,24.438) R26.2 ; R23.1 v1(117,34.95) R13.2 ; R10.1 v1(117,45.5) R8.2 ; R5.1 v1(117,55.6) ; v1@38.3,44.05 R1.2 38.962,39.638 R1.3 40.3,36.463 40.237,36.4 v1@40.2,36.4 ; v1@40.2,36.4 41.4,35.2 41.4,34.4 C8.2
  other v1: 93,27.7
NetC1_1: C1.1 OP1.1 R4.2 R4.3 | length 26.1
  Top Layer w0.254: C1.1 83.7,51.3 R4.2 91.737,51.3 R4.3 96.4,47.963 96.4,38.8 94.875,37.275 OP1.1
NetC1_2: C1.2 D1.1 D2.2 P7.1 R2.1 R6.2 | length 30.9
  Top Layer w0.254: P7.1@68.02,59.14 69.8,57.36 69.8,55.4 67.1,52.7 R2.1 68.475,50.175 69.667,51.367 D1.1 71.867,51.3 D2.2 77.4,51.2 C1.2 81.925,51.125 R6.2
NetC4_2: C4.2 R1.1 R7.2 U1.4 | length 8.5
  Top Layer w0.254: U1.4 32.589,38.816 34.384,38.816 R7.2 ; C4.2 R7.2 ; R1.1 36.738,38.7 R7.2
NetC5_1: C5.1 OP1.7 R11.2 R11.3 | length 16.9
  Top Layer w0.254: OP1.7 87.242,37.858 83.6,41.5 C5.1 87.62,45.963 R11.2 91.738,45.963 R11.3
NetC5_2: C5.2 D4.1 D5.2 P7.3 R12.1 R16.2 | length 42.6
  Top Layer w0.254: P7.3@65.48,59.14 67.1,57.52 67.1,56.221 65.3,54.421 65.3,40.62 67.061,38.858 R12.1 70.686,38.858 D4.1 71.867,37.811 D5.2 77.797,37.314 R16.2 81.925,41.868 C5.2
NetC9_1: C9.1 R15.1 R18.2 U2.4 | length 9.1
  Top Layer w0.254: U2.4 49.195,42.295 50.738,43.838 R15.1 53.3,42.337 C9.1
NetC13_1: C13.1 OP1.14 R24.2 R24.3 | length 26.7
  Top Layer w0.254: C13.1 89.634,23.429 R24.2 ; R24.3 91.738,23.163 R24.2 ; OP1.14 96.6,30.588 96.6,25 93.2,21.6 90.3,21.6 89.9,22 R24.2
NetC13_2: C13.2 D7.1 D8.2 P7.5 R20.1 R25.2 | length 68.5
  Top Layer w0.254: P7.5@62.94,59.14 61.809,60.271 59.932,60.271 59.4,59.739 59.4,56 59.932,55.469 61.753,55.469 64.284,52.938 64.284,22.502 67.061,19.725 R20.1 70.708,19.725 D7.1 71.867,18.7 D8.2 81.825,18.7 R25.2 81.925,23.354 C13.2
NetC14_1: C14.1 OP1.8 R29.2 R29.3 | length 23.6
  Top Layer w0.254: C14.1 C14.1@83.7,32.586 ; v1(83.7,30.7) C14.1@83.7,32.586 ; OP1.8 83.961,32.325 C14.1@83.7,32.586 ; v1(87.7,20.6) 89.9,18.4 R29.2 91.737,18.1 R29.3
  Bottom Layer w0.254: v1(83.7,30.7) 83.7,27.237 84.716,26.221 84.716,23.584 v1(87.7,20.6)
NetC14_2: C14.2 D9.1 D10.2 P7.7 R30.1 R32.2 | length 51.2
  Top Layer w0.254: P7.7@60.4,59.14 62,57.54 62,55.94 64.792,53.148 64.792,39.378 67.1,37.07 R30.1 69.242,31.042 70.456,32.256 D9.1 71.867,32.189 D10.2 77.797,32.686 C14.2 82,28.132 R32.2
NetD3_1: D3.1 L1.2 U1.8 | length 13.2
  Top Layer w0.254: D3.1 21.975,35.595 U1.8 28.781,33.414 L1.2
NetD6_1: D6.1 L2.2 U2.8 | length 9.2
  Top Layer w0.254: D6.1 52.98,33.775 53.174,33.581 L2.2
NetIC1_1: IC1.1 J1.2 P2.2 R8.1 | length 32.3
  Top Layer w0.254: IC1.1@103.173,48.191 IC1.1 104.425,48.375 v1(104.8,48) ; P2.2 111.44,39.74 112.2,40.5 113.1,40.5 115,42.4 v1(115,47.4) 115,47.614 116.961,49.575 R8.1 117.025,49.6 J1.2
  Bottom Layer w0.254: v1(104.8,48) 114.4,48 v1(115,47.4)
NetIC1_2: IC1.2 J1.1 P2.1 R5.2 | length 38.2
  Top Layer w0.254: IC1.2 102.587,48.326 102.587,47.232 103.319,46.5 105.3,46.5 107.112,48.312 110.807,48.312 110.912,48.418 112.028,48.418 112.133,48.312 113.188,48.312 ; P2.1 108.9,40.5 110,41.6 113.2,41.6 113.8,42.2 113.8,47.7 113.188,48.312 ; J1.1 117.025,52.1 R5.2 113.188,48.312
NetIC1_3: IC1.3 R3.3 | length 18
  Top Layer w0.254: IC1.3@101.952,48.424 IC1.3 101.903,49.469 102.175,49.741 103.535,49.741 104.076,49.2 111.9,49.2 112.7,50 112.7,53.5 112.251,53.949 112.251,53.983 112.028,54.206 111.994,54.206 111.47,54.73 R3.3
NetIC1_4: IC1.4 P1.1 | length 9.3
  Top Layer w0.254: IC1.4 101.317,48.424 101.317,49.717 102.113,50.513 P1.1
NetIC1_6: IC1.6 IC1.7 OP1.3 | length 19.6
  Top Layer w0.254: OP1.3 92.322,35.978 92.8,35.5 95.2,35.5 97.1,37.4 97.1,44.9 99.314,47.114 99.314,48.326 IC1.7 IC1.6
NetIC1_10: IC1.10 IC1.11 OP1.5 | length 23.3
  Top Layer w0.254: OP1.5 89.782,34.936 90.003,34.716 90.918,33.8 92.525,33.8 92.924,34.199 94.699,34.199 97.8,37.3 97.8,44.5 98.3,45 99.1,45 99.363,44.737 IC1.10 IC1.11
NetIC1_13: IC1.13 P3.1 | length 10.8
  Top Layer w0.254: IC1.13 101.317,43.474 101.317,45.417 101.8,45.9 105.1,45.9 107.6,43.4 P3.1
NetIC1_14: IC1.14 R9.3 | length 19.7
  Top Layer w0.254: IC1.14 101.952,43.474 101.952,44.952 102.392,45.392 104.508,45.392 107.792,42.108 111.747,42.108 113,43.361 113,46.219 R9.3
NetIC1_15: IC1.15 J2.1 P2.3 R10.2 | length 29.7
  Top Layer w0.254: IC1.15 102.587,43.474 102.587,44.568 102.81,44.791 103.523,44.791 103.616,44.884 104.4,44.1 104.4,40.8 P2.3 109.841,36.3 110.972,37.431 112.906,37.431 R10.2 117.008,41.533 J2.1
NetIC1_16: IC1.16 J2.2 P2.4 R13.1 | length 27.3
  Top Layer w0.254: IC1.16 103.173,39.927 108.1,35 110.14,35 P2.4 114.286,36.3 116.961,38.975 R13.1 117.058,39.033 J2.2
NetIC2_1: IC2.1 J3.2 P2.6 R26.1 | length 26.2
  Top Layer w0.254: IC2.1 104.38,26.7 107.769,30.089 107.769,31.688 108.432,32.351 109.313,32.351 109.821,32.859 110.539,32.859 P2.6 116.725,28.475 R26.1 117.008,28.467 J3.2
NetIC2_2: IC2.2 J3.1 P2.5 R23.2 | length 26.9
  Top Layer w0.254: IC2.2 102.549,26.749 102.549,27.843 107.565,32.859 108.659,32.859 108.9,33.1 P2.5 109.841,33.76 110.972,34.891 113.009,34.891 115.944,31.956 115.944,31.942 116.961,30.925 R23.2 117.042,30.967 J3.1
NetIC2_3: IC2.3 R22.3 | length 11.9
  Top Layer w0.254: IC2.3 101.914,26.651 101.914,25.557 102.137,25.334 103.732,25.334 106.079,27.681 109.678,27.681 109.996,27.363 R22.3
NetIC2_4: IC2.4 P4.1 | length 10.5
  Top Layer w0.254: IC2.4 101.279,26.651 101.279,24.421 102,23.7 103.7,23.7 104.453,22.947 P4.1
NetIC2_6: IC2.6 IC2.7 OP1.12 | length 16.6
  Top Layer w0.254: OP1.12 92.911,32.914 92.911,33.468 93.135,33.691 95.32,33.691 97.6,31.411 97.6,26.061 98.327,25.334 98.766,25.334 99,25.1 99.276,25.376 99.276,26.651 IC2.7 IC2.6
NetIC2_10: IC2.10 IC2.11 OP1.10 | length 20.8
  Top Layer w0.254: v1(89.1,25.8) 89.193,25.893 89.193,31.736 OP1.10 ; v1(99.3,24) 99.325,23.975 IC2.10 IC2.11
  Bottom Layer w0.254: v1(89.1,25.8) 97.7,25.8 97.6,25.7 v1(99.3,24)
NetIC2_13: IC2.13 P9.1 | length 11.3
  Top Layer w0.254: IC2.13 101.279,21.701 101.279,19.721 105.3,15.7 P9.1
NetIC2_14: IC2.14 R27.3 | length 11
  Top Layer w0.254: IC2.14 101.914,21.701 101.914,20.607 102.137,20.384 108.212,20.384 108.262,20.434 109.678,20.434 109.996,20.116 R27.3
NetIC2_15: IC2.15 J5.1 P2.7 R28.2 | length 47.8
  Top Layer w0.254: IC2.15 102.549,21.799 102.549,22.893 102.772,23.116 103.498,23.116 105.114,21.5 112.8,21.5 113.2,21.9 113.2,26.92 P2.7 110.031,32.351 112.131,32.351 115.1,29.382 115.1,22.261 116.961,20.4 R28.2 J5.1
NetIC2_16: IC2.16 J5.2 P2.8 R31.1 | length 33.5
  Top Layer w0.254: IC2.16 104.145,21.75 104.903,20.992 113.01,20.992 ; P2.8 114,28.66 114,21.982 113.01,20.992 ; J5.2 117.025,17.9 R31.1 113.883,20.992 113.01,20.992
NetOP1_2: OP1.2 R4.1 R17.1 | length 16.2
  Top Layer w0.254: R4.1 95.892,47.146 95.892,40.792 95.125,40.025 94.3,40.025 94.181,39.907 94.181,37.864 OP1.2
NetOP1_6: OP1.6 R11.1 R14.1 | length 14.9
  Top Layer w0.254: OP1.6 87.923,37.864 87.923,39.901 87.8,40.025 86.875,40.025 86.1,40.8 86.1,43.724 86.876,44.5 91.6,44.5 R11.1
NetOP1_9: OP1.9 R19.1 R29.1 | length 23.8
  Top Layer w0.254: v1(85.2,29.5) 87.675,29.5 87.8,29.375 87.923,29.499 87.923,31.736 OP1.9 ; R29.1 94.362,17.438 v1(94.4,17.4)
  Bottom Layer w0.254: v1(85.2,29.5) 85.2,26.6 v1(94.4,17.4)
NetOP1_13: OP1.13 R21.1 R24.1 | length 12.7
  Top Layer w0.254: R24.1 96.092,26.192 96.092,28.122 94.839,29.375 R21.1 94.3,29.375 94.181,29.493 94.181,31.736 OP1.13
NetP1_2: P1.2 R3.1 R3.2 | length 5.8
  Top Layer w0.254: R3.2 109.632,53.538 R3.1 111.44,53.508 P1.2
NetP3_2: P3.2 R9.1 R9.2 | length 5.8
  Top Layer w0.254: R9.2 109.632,46.424 R9.1 111.44,46.394 P3.2
NetP4_2: P4.2 R22.1 R22.2 | length 5.9
  Top Layer w0.254: R22.2 109.633,26.037 R22.1 111.44,26.008 P4.2
NetP9_2: P9.2 R27.1 R27.2 | length 5.9
  Top Layer w0.254: R27.2 110.807,19.453 R27.1 111.44,18.761 P9.2
Vbat+: C2.1 C8.1 J4.1 U1.7 U2.7 | length 83.3
  Top Layer w0.254: C2.1 10,41.75 J4.1 ; U1.7 26.035,36.3 J4.1 ; U2.7 51.735,28.835 46.8,23.9 C8.1 22.4,23.9 J4.1
pads on no net: P5.1 P5.2 P5.3 P5.4 P5.5 P5.6 P5.7 P5.8 P5.9 P5.10 P5.11 P5.12 P5.13 P5.14 P5.15 P5.16 P5.17 P5.18 P5.19 P5.20 P6.1 P6.2 P6.3 P6.4 P6.5 P6.6 P6.8 P6.9 P6.10 P6.12 P6.14 P6.16 P7.2 P7.4 P7.6 P7.8 P7.9 P7.10 P7.11 P7.12 P7.13 P7.14 P7.15 P7.16 P7.17 P7.18 P7.19 P7.20 P7.21 P7.22 P7.23 P7.24 P7.25 P7.26 P7.27 P7.28 P7.29 P7.30 P8.1 P8.2 P8.3 P8.4 P8.5 P8.6 P8.7 P8.8 P8.9 P8.10 P8.11 P8.12 P8.13 P8.14 P8.15 P8.16 P8.17 P8.18 P8.19 P8.20 P8.21 P8.22 P8.23 P8.24 P8.25 P8.26 P8.27 P8.28 P8.29 P8.30 P8.31 P8.32 P8.33 P8.34

## Polygon pours and split planes (outlines as drawn)
GND on Ground Plane (split plane): 131.005,69.482 131.197,69.454 131.386,69.407 131.569,69.341 131.745,69.258 131.911,69.158 132.068,69.042 132.212,68.912 132.342,68.768 132.458,68.611 132.558,68.445 132.641,68.269 132.707,68.086 132.754,67.897 132.782,67.705 132.791,67.526 132.79,67.511 132.79,2.489 132.791,2.474 132.782,2.295 132.754,2.103 132.707,1.914 132.641,1.731 132.558,1.555 132.458,1.389 132.342,1.232 132.212,1.088 132.068,0.958 131.911,0.842 131.745,0.742 131.569,0.659 131.386,0.593 131.197,0.546 131.005,0.518 130.826,0.509 130.811,0.51 2.489,0.51 2.474,0.509 2.295,0.518 2.103,0.546 1.914,0.593 1.731,0.659 1.555,0.742 1.389,0.842 1.232,0.958 1.088,1.088 0.958,1.232 0.842,1.389 0.742,1.555 0.659,1.731 0.593,1.914 0.546,2.103 0.518,2.295 0.509,2.474 0.51,2.489 0.51,67.511 0.509,67.526 0.518,67.705 0.546,67.897 0.593,68.086 0.659,68.269 0.742,68.445 0.842,68.611 0.958,68.768 1.088,68.912 1.232,69.042 1.389,69.158 1.555,69.258 1.731,69.341 1.914,69.407 2.103,69.454 2.295,69.482 2.474,69.491 2.489,69.49 130.811,69.49 130.826,69.491

## Silkscreen, mask and mechanical layers (free items; w line width, h text height)
Top Overlay:
  lines w0.254: 106.7,3.2 106.7,3.4 106.7,7.6 130,7.6 130,3.4 130,3.2 106.7,3.2
  text "Gain 2 / hyd 1" at 88.6,49.8 h0.51 r90
  text "Gain 1 hyd 1" at 107.1,49.7 h0.51 r90
  text "+12V adjustment" at 48.5,46.5 h0.51
  text "Gain 2 / hyd 2" at 88.6,44.5 h0.51 r90
  text "Gain 1 hyd 2" at 107.1,42.5 h0.51 r90
  text "+" at 14,36 h0.51
  text "-12V adjustment" at 36.4,35.2 h0.51 r90
  text "-" at 14,33.5 h0.51
  text "Gain 1 hyd 3" at 107.1,22 h0.51 r90
  text "Gain 2 / hyd 3" at 88.6,21.7 h0.51 r90
  text "Gain 2 / hyd 4" at 88.6,16.6 h0.51 r90
  text "Gain 1 hyd 4" at 107.1,14.8 h0.51 r90
  text "Jumper settings: /  / Open jumper:     Gain 1 = 5 / Closed jumper:    Gain 1 adjustment with potentiometer" at 106.9,3.4 h0.51

## Text inside footprints (layer, text, board x,y; h text height)
D3: Top Overlay "K" at 22,33.548 h0.51 r90
D6: Top Overlay "K" at 53.9,32.1 h0.51 r180
P2: Top Overlay "Hyd 2" at 104.7,36.1 h0.51; Top Overlay "Hyd 1" at 104.7,38.7 h0.51; Top Overlay "Hyd 3" at 104.7,33.5 h0.51; Top Overlay "Hyd 4" at 104.7,31 h0.51
P5: Top Overlay "2" at 102.04,10.66 h0.51; Top Overlay "1" at 102.14,13.16 h0.51; Top Overlay "19" at 77.14,14.96 h0.51; Top Overlay "20" at 77.04,8.76 h0.51
P6: Top Overlay "16" at 71,56.3 h0.51; Top Overlay "15" at 71,58.9 h0.51; Top Overlay "1" at 93.1,58.9 h0.51; Top Overlay "2" at 93,56.4 h0.51
P7: Top Overlay "30" at 30.2,55.1 h0.51; Top Overlay "29" at 30.2,60.1 h0.51; Top Overlay "2" at 70,56.3 h0.51; Top Overlay "1" at 70.1,58.9 h0.51
P8: Top Overlay "34" at 32.4,8.8 h0.51; Top Overlay "33" at 32.4,14.9 h0.51; Top Overlay "1" at 75.1,13.2 h0.51; Top Overlay "2" at 75.1,10.6 h0.51